# Altium PCB Copy of DAP-PCB.PcbDoc (part 2 of 5)
Units mm, origin at the board's own origin, x right, y up, seen from the top; angles counter-clockwise.
Board outline 63 x 53 mm, 6 copper layers (Top Layer (Sig), L2 (GND), L3 (Sig), L4 (Sig), L5 (GND), Bottom Layer (Sig)), stack 0.87 mm thick; 262 components, 167 nets, 874 pads, 298 vias.
Unrouted connection lines stored in the file: 134.
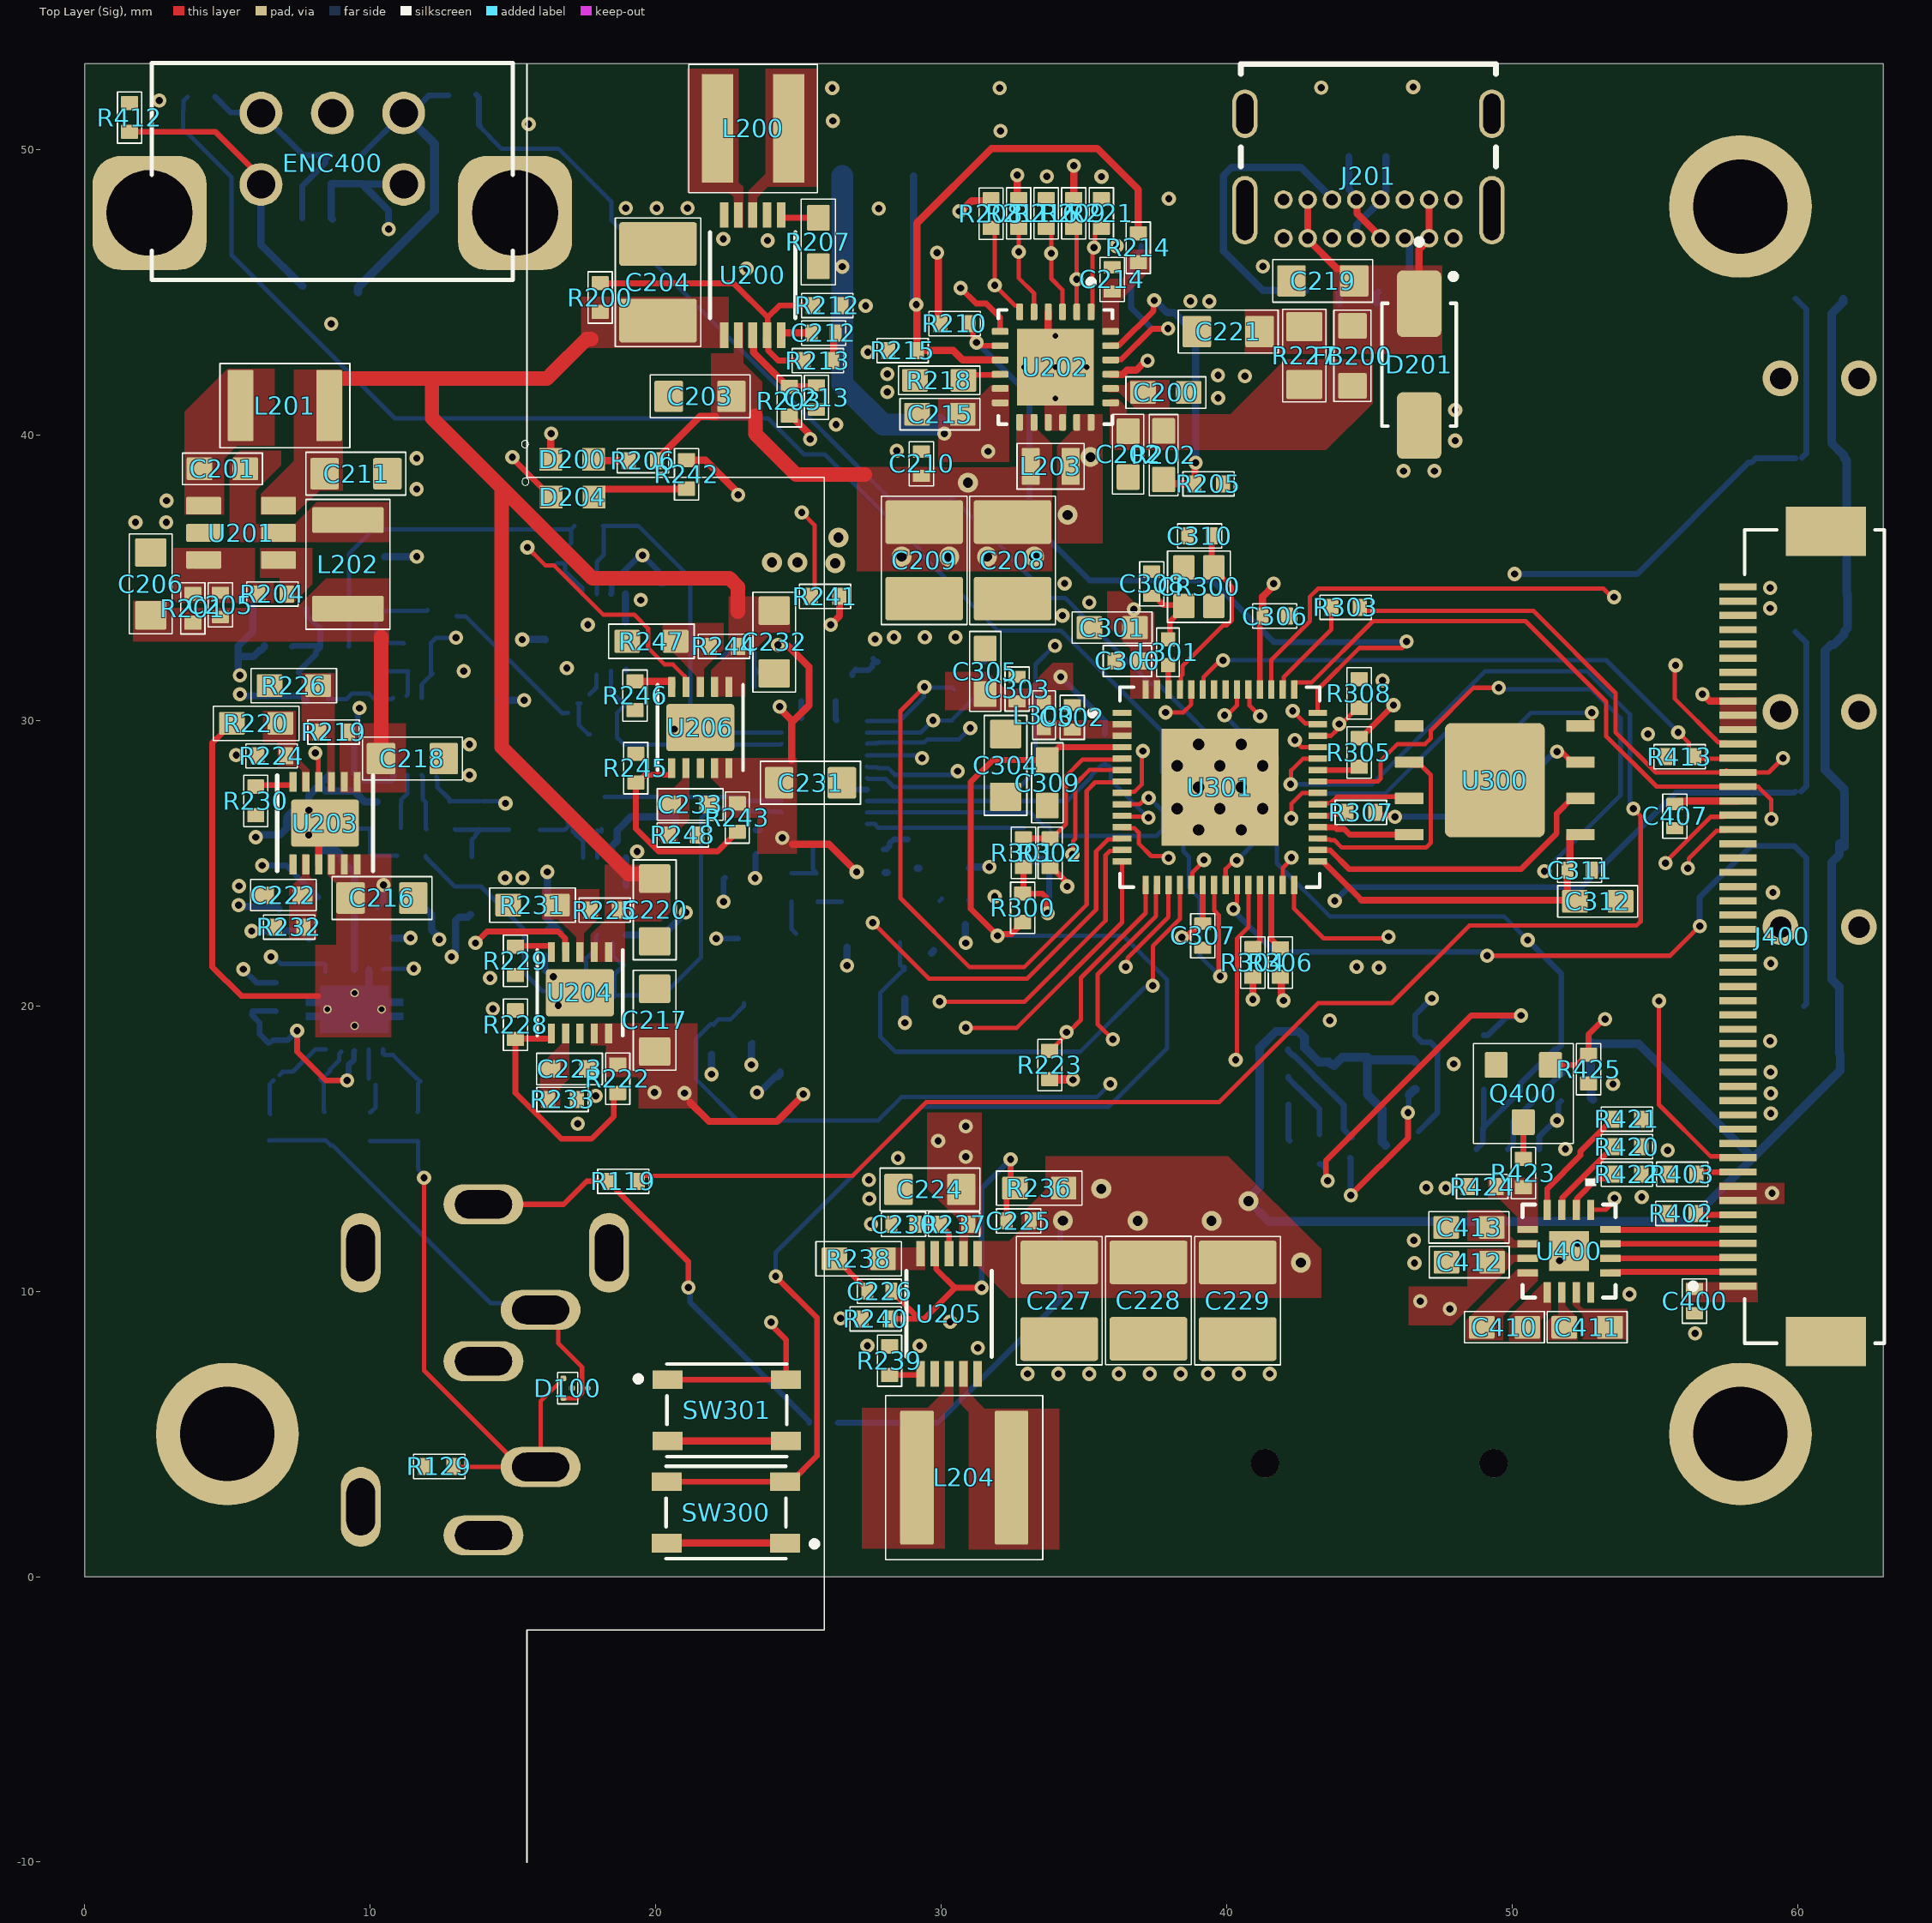
[diagram p0: Top Layer (Sig) view]

## Part data (continued)
ENC400: library part #1-135, Manufacturer 1="TT Electronics", Manufacturer Part Number 1=EN12-VS11AF18, Supplier Part Number 1=987-1198-ND, <Termination>=Thru, AL-PN=#1-135, Creator Project=DAP, Lead Time="34 Weeks", PartType=Encoder, Status=Verified, SubType=Quadrature, Supplier 1=Digikey, Supplier Label="Rotary Encoder Mechanical 12 Quadrature (Incremental) Right Angle", Type=Standard
FB200: library part #1-068, <Rating>=3A, <Value>=120Ohm, Manufacturer 1="Würth Elektronik", Manufacturer Part Number 1=742792023, Supplier Part Number 1=732-1613-1-ND, <Footprint>=0805, <Termination>=SMD, AL-PN=#1-068, Creator Project=DAP, Lead Time="33 Weeks", PartType=Misc, Status=Verified, SubType="Ferrite Bead", Supplier 1=Digikey, Supplier Label="120 Ohms @ 100 MHz 1 Signal Line Ferrite Bead 0805 (2012 Metric) 3A 30mOhm", Type=Standard
J100: library part #1-111, <Value>=3.5mm, Manufacturer 1="Same Sky", Manufacturer Part Number 1=SJ1-3535NS, Package=None, Supplier Part Number 1=CP1-3535NS-ND, <Termination>=Thru, AL-PN=#1-111, Check_prices=https://www.snapeda.com/parts/SJ1-3535NS/Same+Sky/view-part/?ref=eda, Creator Project=DAP, Lead Time="19 Weeks", MF="Same Sky", MP=SJ1-3535NS, PartType=Connector, SnapEDA_Link=https://www.snapeda.com/parts/SJ1-3535NS/Same+Sky/view-part/?ref=snap, Status=Verified, SubType=Audio, Supplier 1=Digikey, Supplier Label="3.50mm (0.141\", 1/8\", Mini Plug) - Headphone Phone Jack Stereo (3 Conductor, TRS) Connector Solder", Type=Standard
J200: library part #1-137, <Value>=3x1, Manufacturer 1=Molex, Manufacturer Part Number 1=5055670381, Package=None, Supplier Part Number 1=WM22227CT-ND, <Termination>=SMD, AL-PN=#1-137, Availability=Unavailable, Creator Project=DAP, Lead Time="19 Weeks", MF="{'manufacturer': u'Molex'}", MP=436500329, PartType=Connector, Price=None, Status=Verified, SubType=Header, Supplier 1=Digikey, Supplier Label="Connector Header Surface Mount, Right Angle 3 position 0.049\" (1.25mm)", Type=Standard
J201: library part #1-069, <Rating>=5A, <Value>=48V, Manufacturer 1=GCT, Manufacturer Part Number 1=USB4085-GF-A, Package=None, Supplier Part Number 1=2073-USB4085-GF-ACT-ND, <Spec>=USB-C, <Termination>=Thru, AL-PN=#1-069, Availability="In Stock", Check_prices=https://www.snapeda.com/parts/USB4085-GF-A/Global+Connector+Technology/view-part/?ref=eda, Creator Project=DAP, Lead Time="7 Weeks", MF="Global Connector Technology", MP=USB4085-GF-A, PartType=Connector, Price=None, Purchase-URL=https://pricing.snapeda.com/search/part/USB4085-GF-A/?ref=eda, SnapEDA_Link=https://www.snapeda.com/parts/USB4085-GF-A/Global+Connector+Technology/view-part/?ref=snap, Status=Verified, SubType=USB, Supplier 1=Digikey, Supplier Label="USB-C (USB TYPE-C) USB 2.0 Receptacle Connector 24 (16+8 Dummy) Position Through Hole, Right Angle", Type=Standard
J400: library part #1-117, <Value>=50-Pin, Manufacturer 1="Amphenol ICC", Manufacturer Part Number 1=F32D-1A7Y1-21050, Package=None, Supplier Part Number 1=609-F32D-1A7Y1-21050CT-ND, <Footprint>=R/A, <Termination>=SMD, AL-PN=#1-117, Check_prices=https://www.snapeda.com/parts/F32D-1A7Y1-21050/Amphenol+FCI/view-part/?ref=eda, Creator Project=DAP, Lead Time="13 Weeks", MF="Amphenol ICC (FCI)", MP=F32D-1A7Y1-21050, PartType=Connector, SnapEDA_Link=https://www.snapeda.com/parts/F32D-1A7Y1-21050/Amphenol+FCI/view-part/?ref=snap, Status=Verified, SubType=FFC, Supplier 1=Digikey, Supplier Label="50 Position FFC, FPC Connector Contacts, Top and Bottom 0.020\" (0.50mm) Surface Mount, Right Angle", Type=Standard
J401: library part #1-126, Manufacturer 1="Same Sky", Manufacturer Part Number 1=MSD-1-A, Package=None, Supplier Part Number 1=2223-MSD-1-ACT-ND, <Termination>=SMD, AL-PN=#1-126, Check_prices=https://www.snapeda.com/parts/MSD-1-A/Same+Sky/view-part/?ref=eda, Creator Project=DAP, Lead Time="8 Weeks", MF="Same Sky", MP=MSD-1-A, PartType=Connector, SnapEDA_Link=https://www.snapeda.com/parts/MSD-1-A/Same+Sky/view-part/?ref=snap, Status=Verified, SubType=Micro-SD, Supplier 1=Digikey, Supplier Label="9 (8 + 1) Position Card Connector microSD™ Surface Mount, Right Angle Gold", Type=Standard
L200: library part #1-076, <Rating>=3.5A, <Tolerance>=0.2, <Value>=6.8uH, Manufacturer 1="Bourns Inc.", Manufacturer Part Number 1=SRP4030FA-6R8M, Supplier Part Number 1=SRP4030FA-6R8MCT-ND, <Spec>=74.1mOhm, <Termination>=SMD, AL-PN=#1-076, Creator Project=DAP, Lead Time="22 Weeks", PartType=Inductor, Status=Verified, SubType=Shielded, Supplier 1=Digikey, Supplier Label="6.8 µH Shielded Drum Core, Wirewound Inductor 4 A 74.1mOhm Max Nonstandard", Type=Standard
L201 L202: library part #1-090, <Rating>=400mA, <Tolerance>=0.2, <Value>=22uH, Manufacturer 1="Murata Electronics", Manufacturer Part Number 1=490-LQW32FT220M2HLTR, Supplier Part Number 1=490-LQW32FT220M2HLCT-ND, <Footprint>=1210, <Spec>=810mOhm, <Termination>=SMD, AL-PN=#1-090, Creator Project=DAP, Lead Time="25 Weeks", PartType=Inductor, Status=Verified, SubType=Shielded, Supplier 1=Digikey, Supplier Label="22 µH Shielded Wirewound Inductor 300 mA 810mOhm Max 1210 (3225 Metric)", Type=Standard
L203: library part #1-063, <Rating>=2A, <Tolerance>=0.2, <Value>=1.0uH, Manufacturer 1=TDK, Manufacturer Part Number 1=TFM141206BLE-1R0MTCA, Supplier Part Number 1=445-TFM141206BLE-1R0MTCACT-ND, <Footprint>=0505, <Spec>=96mOhm, <Termination>=SMD, AL-PN=#1-063, Creator Project=DAP, Lead Time="20 Weeks", PartType=Inductor, Status=Verified, SubType=Shielded, Supplier 1=Digikey, Supplier Label="1 µH Shielded Thin Film Inductor 2 A 96mOhm Max 0505 (1412 Metric)", Type=Standard